# Altium PCB main.PcbDoc
Units mm, origin at the board's own origin, x right, y up, seen from the top; angles counter-clockwise.
Board outline 25 x 22.3 mm, 2 copper layers (Top Layer, Bottom Layer); 14 components, 16 nets, 52 pads, 18 vias.
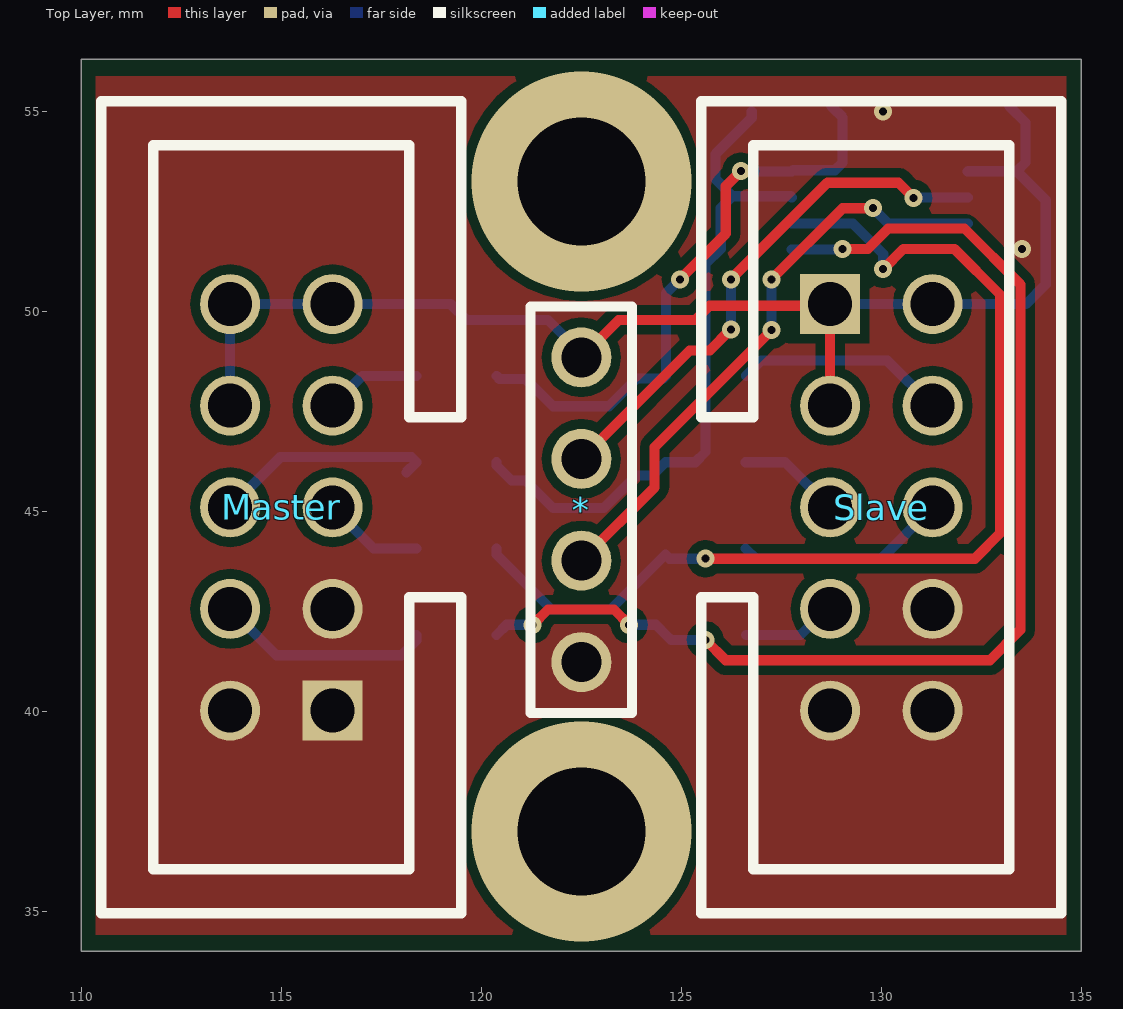
[diagram p0: Top Layer view]
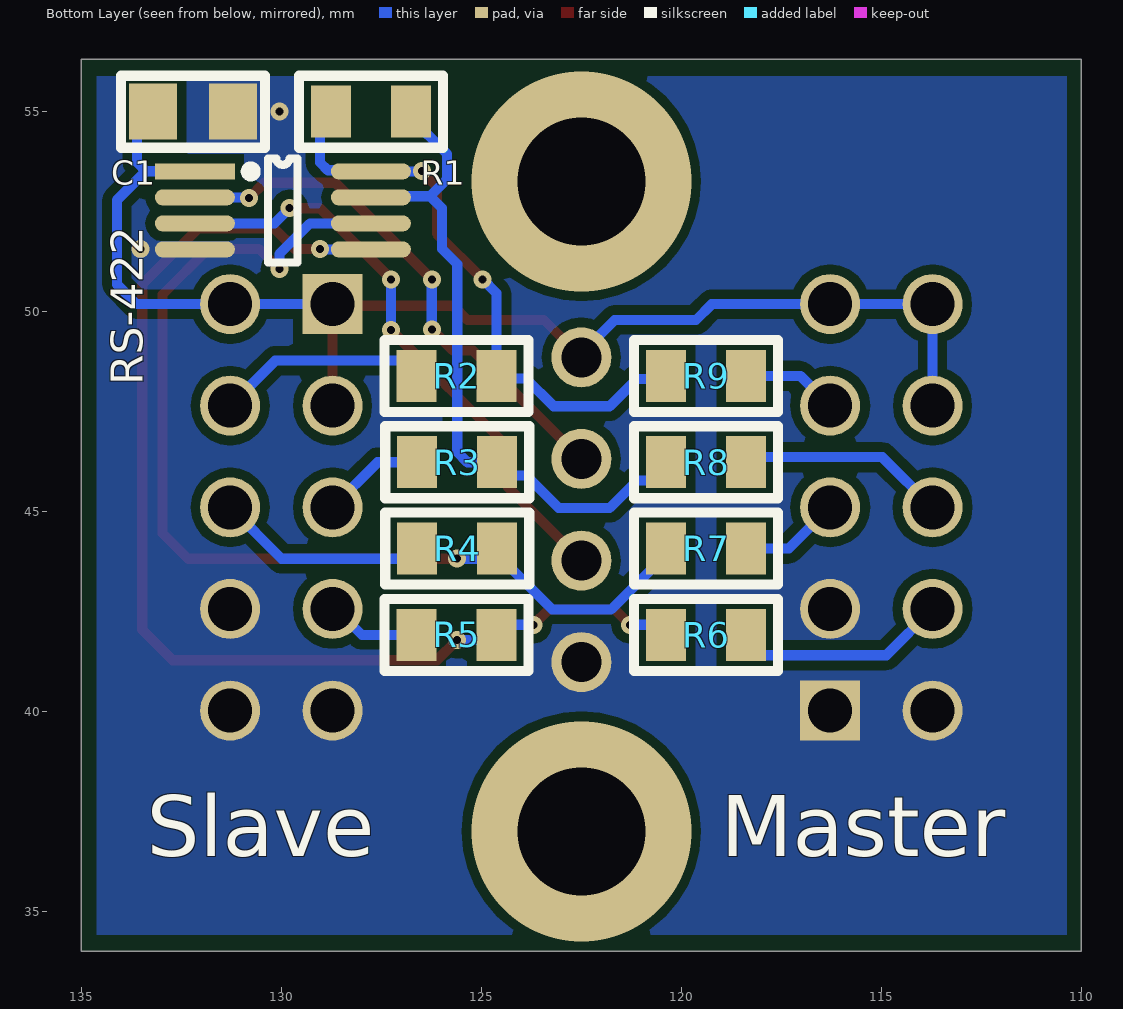
[diagram p1: Bottom Layer view, seen from below]
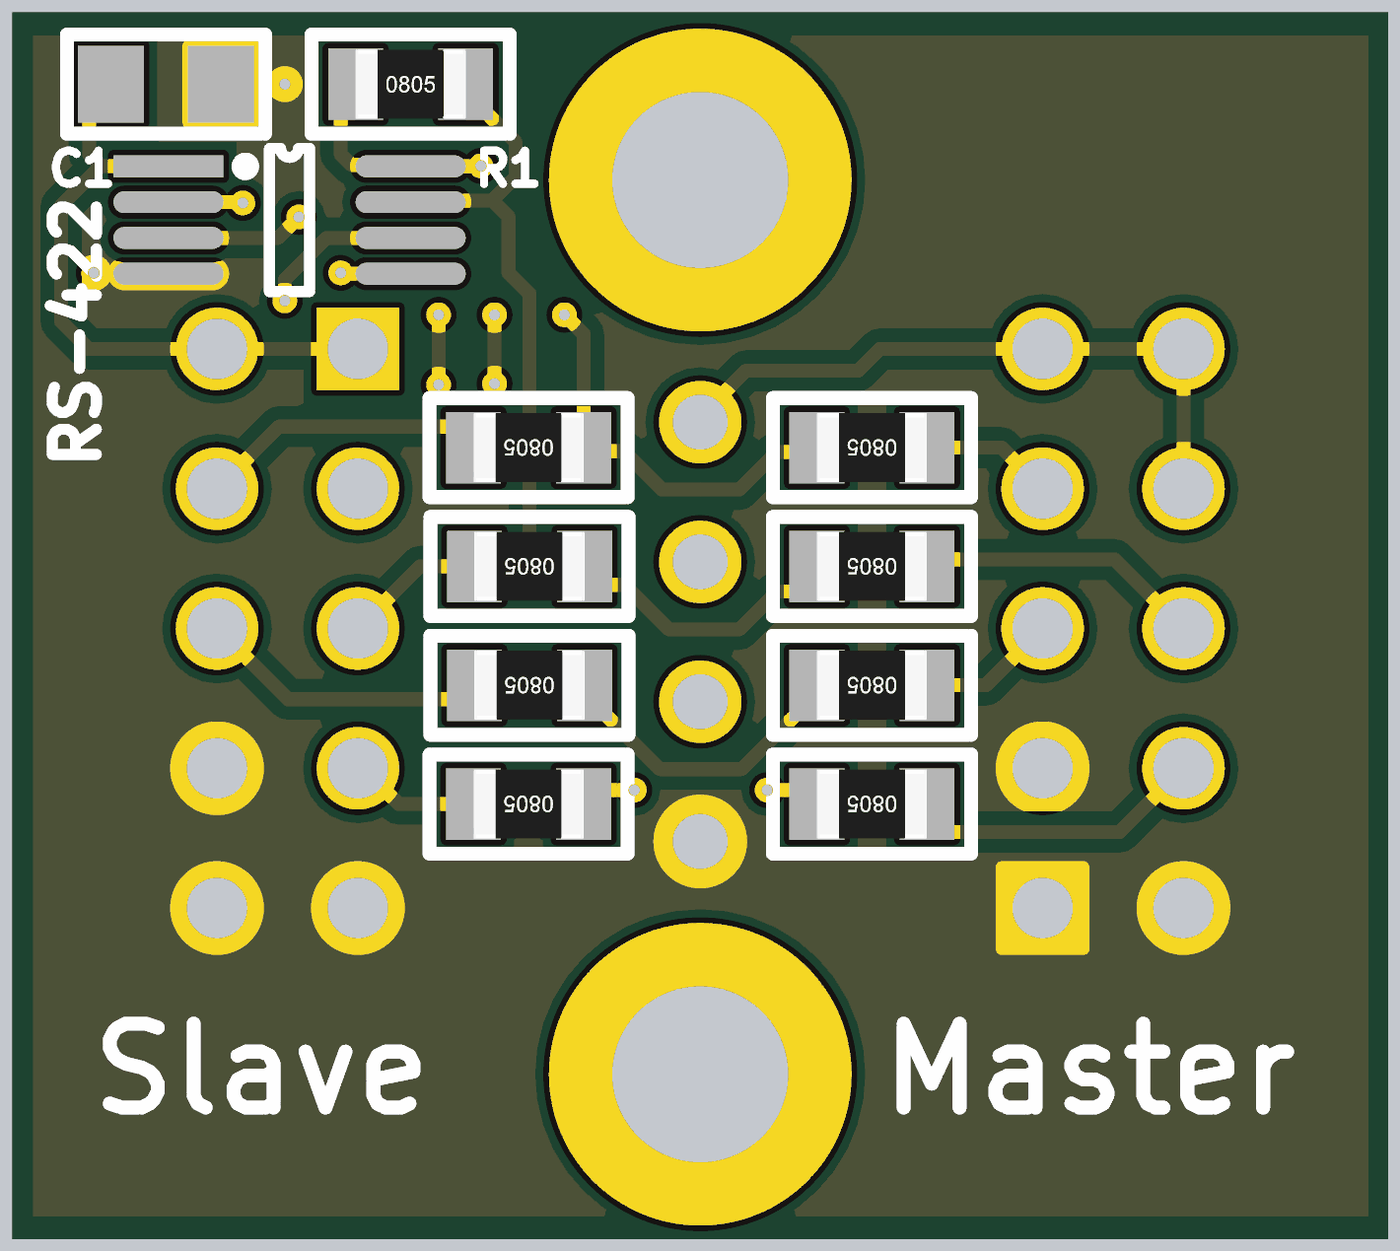
[diagram p2: 3D render of the assembled board from below, using the file's embedded part models]

## Layer stack, top to bottom
Top Solder: solder mask 0.0102, Solder Resist, Dk 3.5
Top Layer: signal copper 0.0356
Dielectric 1: dielectric 0.32, FR-4, Dk 4.8
Bottom Layer: signal copper 0.0356
Bottom Solder: solder mask 0.0102, Solder Resist, Dk 3.5

## Board outline
110,34 110,56.3 135,56.3 135,34

## Design rules (kind name [scope] priority, off if disabled: settings)
Clearance [All] p1: gap=0.24 ignorepadtopadclearanceinfootprint=FALSE
HoleSize [All] p1: absolutevalues=TRUE maxlimit=100 minlimit=0.025 maxpercent=80.000 minpercent=20.000
MinimumSolderMaskSliver [All] p1: minsoldermaskwidth=0
PolygonConnect [All] p1: connectstyle=Direct reliefconductorwidth=0.254 reliefentries=4 polygonreliefangle="90 Angle" airgapwidth=0.254
RoutingVias [All] p1: holewidth=0.2 width=0.45 viastyle="Through Hole" minholewidth=0.2 minwidth=0.45 maxholewidth=100 maxwidth=100
SilkToSilkClearance [All] p1: silktosilkclearance=0
SilkToSolderMaskClearance [IsPad] p1: minsilkscreentomaskgap=0 clearancetoexposedcopper=TRUE
SolderMaskExpansion [All] p1: expansion=0.102 istentingtop=FALSE
Width [All] p1: maxlimit=0.254 minlimit=0.254 preferedwidth=0.254
26 further rules are at their usual default settings.

## Components (designator, comment, footprint, x,y, rotation, side; value= is the part's Value field where it differs from the comment)
* "JUMPER_4" JUMPER_4 122.5,48.85 r270 top
C1 "100nF" FP_0805_CAP_085 132.207,54.991 r180 bottom
Master "Connector_10pin" FP_CONN10_SZK_ALLO 115,45.1 r90 top
R1 "120R" FP_0805_RES 127.762,54.991 r180 bottom
R2 "0R" FP_0805_RES 125.619,48.387 r0 bottom value=?
R3 "0R" FP_0805_RES 125.603,46.228 r0 bottom value=?
R4 "0R" FP_0805_RES 125.603,44.069 r0 bottom value=?
R5 "0R" FP_0805_RES 125.619,41.91 r0 bottom value=?
R6 "0R" FP_0805_RES 119.38,41.91 r0 bottom value=?
R7 "0R" FP_0805_RES 119.38,44.069 r0 bottom value=?
R8 "0R" FP_0805_RES 119.38,46.228 r0 bottom value=?
R9 "0R" FP_0805_RES 119.38,48.387 r0 bottom value=?
RS-422 "RS-422" NSOIC-8 132.162,53.497 r180 bottom
Slave "Connector_10pin" FP_CONN10_SZK_ALLO 130,45.1 r270 top

## Footprints (in the part's own frame and the unit in brackets; to place one, negate y for a bottom-side part, rotate by r counter-clockwise, add the part's x,y. Pads: shape width x height; smd on the part's side, far side on the other; paste and mask are expansions set on the pad)
FP_0805_CAP_085 [mm] "0805 kapacitás YAGEO 0.85mm magas"
  rect 1.2x1.4 smd: 1(-1,0) 2(1,0)
  silkscreen extent -1.8,-0.9 1.8,0.9, body extent -1,-0.64 1.03,0.64, height 0.85
FP_0805_RES [mm] "0805 ellenállás"
  rect 1x1.3 smd: 1(-1,0) 2(1,0)
  silkscreen extent -1.8,-0.9 1.8,0.9, body extent -1,-0.62 1,0.63, height 0.62
FP_CONN10_SZK_ALLO [mm]
  rect 1.5x1.5 hole 1.1: 1(-5.08,-1.28)
  round 1.5 hole 1.1: 2(-5.08,1.28) 3(-2.54,-1.28) 4(-2.54,1.28) 5(0,-1.28) 6(0,1.28) 7(2.54,-1.28) 8(2.54,1.28) 9(5.08,-1.28) 10(5.08,1.28)
  silkscreen extent -10.15,-4.5 10.15,4.5, body extent -5.33,-1.33 5.49,1.87, height 9
JUMPER_4 [mm]
  round 1.5 hole 1: 1(0,0) 2(2.54,0) 3(5.08,0) 4(7.62,0)
  silkscreen extent -1.27,-1.27 8.89,1.27
NSOIC-8 [mm]
  rect 2x0.4 smd: 1(0,0)
  oval 2x0.4 smd: 2(0,-0.65) 3(0,-1.3) 4(0,-1.95) 5(4.4,-1.95) 6(4.4,-1.3) 7(4.4,-0.65) 8(4.4,0)
  silkscreen extent 1.27,-2.28 2.56,0.33

## Part data
C1: library part "CAP 100nF", "Capacitor", Tolerance=+80%/-20%, Voltage=25V, Name="SMD Multilayer Ceramic Capacitor, 0805", Reference=1759167, Supplier=Farnell
R1: library part "RES 120R", "Resistor", Power=125mW, Tolerance=5%, Name="YAGEO (PHYCOMP)  RC0805JR-07120RL  SMD Chip Resistor, Thick Film, 120 ohm", Reference=9233890, Supplier=Farnell
R2 R3 R4 R5 R6 R7 R8 R9: library part RES, "Resistor"
RS-422: library part ISL83071, "RS-422 transceiver 3V3"

## Via types
v1: diameter 0.45, hole 0.2, Top Layer to Bottom Layer, 16 vias
v2: diameter 5.5, hole 3.2, Top Layer to Bottom Layer, 2 vias

## Nets (pads, with @x,y where several pads share a name; then routed paths per layer and width w, separated by ;. In a path a pad name is that pad's centre, name@x,y a point inside that pad or via, vN(x,y) a via of type N, cw(c..) or ccw(c..) an arc to the next point about the centre after c; other vN are vias at no path point)
3V3: *.1 C1.1 Master.8 Master.9 Master.10 RS-422.1 Slave.1 Slave.2 Slave.3 | length 33.1
  Top Layer w0.254: *.1 123.434,49.784 125.349,49.784 125.706,50.141 128.681,50.141 Slave.1 Slave.3
  Bottom Layer w0.254: Master.8 Master.10 Master.9 119.238,50.18 119.634,49.784 121.666,49.784 122.5,48.95 *.1 ; Slave.1 Slave.2 133.619,50.18 134.112,50.673 134.112,52.778 133.386,53.503 ; RS-422.1 132.168,53.503 133.386,53.503 ; C1.1@133.207,55.118 133.604,54.721 133.604,53.721 133.386,53.503
GND: *.4 C1.2 Master.1 Master.2 Master.3 RS-422.4 Slave.8 Slave.9 Slave.10
  other v1: 133.52,51.562 130.048,54.991
NetMaster_4: Master.4 R6.1 | length 5.4
  Bottom Layer w0.254: Master.4 114.878,41.402 118.007,41.402 118.38,41.775 R6.1
NetMaster_5: Master.5 R7.1 | length 2.5
  Bottom Layer w0.254: Master.5 117.311,44.069 R7.1
NetMaster_6: Master.6 R8.1 | length 5.6
  Bottom Layer w0.254: Master.6 114.975,46.355 118.253,46.355 R8.1 R8.1@118.126,45.974
NetMaster_7: Master.7 R9.1 | length 2.4
  Bottom Layer w0.254: Master.7 117.027,48.387 R9.1
NetR1_1: R1.1 R2.1 R9.2 RS-422.8 | length 14.9
  Top Layer w0.254: v1(124.968,50.8) 126.111,51.943 126.111,53.129 v1(126.488,53.506)
  Bottom Layer w0.254: R9.2 120.461,48.306 121.112,48.306 121.793,47.625 123.19,47.625 123.887,48.322 124.554,48.322 R2.1 124.619,50.451 v1(124.968,50.8) ; v1(126.488,53.506) 126.496,53.497 RS-422.8 127.79,53.525 128.836,53.525 129.032,53.721 129.032,54.848 R1.1@128.762,55.118
NetR1_2: R1.2 R3.1 R8.2 RS-422.7 | length 17.2
  Bottom Layer w0.254: R8.2 120.38,46.146 120.753,45.773 121.105,45.773 121.793,45.085 123.063,45.085 123.871,45.893 124.268,45.893 R3.1 125.349,46.228 125.603,46.482 125.603,51.181 125.984,51.562 125.984,52.578 126.281,52.875 ; R1.2 126.762,54.841 125.857,53.936 125.857,53.299 126.281,52.875 ; RS-422.7 127.734,52.875 126.281,52.875
NetR2_2: R2.2 Slave.4 | length 5.3
  Bottom Layer w0.254: R2.2 126.619,48.395 126.992,48.768 130.152,48.768 Slave.4
NetR3_2: R3.2 Slave.5 | length 2.6
  Bottom Layer w0.254: R3.2 127.592,46.228 Slave.5
NetR4_1: R4.1 R7.2 RS-422.6 | length 26.7
  Top Layer w0.254: v1(125.603,43.815) 132.334,43.815 132.969,44.45 132.969,50.419 131.826,51.562 130.556,51.562 v1(130.048,51.054)
  Bottom Layer w0.254: R7.2 120.38,43.919 120.753,43.546 121.754,42.545 123.229,42.545 124.23,43.546 124.603,43.919 124.707,43.815 v1(125.603,43.815) ; RS-422.6 129.286,52.197 130.048,51.435 v1(130.048,51.054)
NetR4_2: R4.2 Slave.6 | length 5.3
  Bottom Layer w0.254: R4.2 126.857,43.815 129.995,43.815 Slave.6
NetR5_1: R5.1 R6.2 RS-422.5 | length 29.3
  Top Layer w0.254: v1(121.285,42.164) 121.666,42.545 123.317,42.545 v1(123.698,42.164) ; v1(125.603,41.783) 126.111,41.275 132.715,41.275 133.477,42.037 133.477,50.673 132.08,52.07 130.175,52.07 129.667,51.562 v1(129.032,51.562)
  Bottom Layer w0.254: R6.2 120.634,42.164 v1(121.285,42.164) ; v1(123.698,42.164) 124.365,42.164 R5.1 124.746,41.783 v1(125.603,41.783) ; RS-422.5 129.017,51.547 v1(129.032,51.562)
NetR5_2: R5.2 Slave.7 | length 2.4
  Bottom Layer w0.254: R5.2 127.981,41.91 128.631,42.56 Slave.7
RX: *.2 RS-422.2 | length 13.4
  Top Layer w0.254: *.2 125.212,49.022 125.711,49.022 v1(126.238,49.549) ; v1(126.238,50.8) 128.651,53.213 130.429,53.213 v1(130.81,52.832)
  Bottom Layer w0.254: v1(126.238,49.549) v1(126.238,50.8) ; v1(130.81,52.832) 130.825,52.847 RS-422.2
TX: *.3 RS-422.3 | length 14.8
  Top Layer w0.254: *.3 124.333,45.603 124.333,46.609 v1(127.254,49.53) ; v1(127.254,50.8) 129.032,52.578 v1(129.794,52.578)
  Bottom Layer w0.254: v1(127.254,49.53) v1(127.254,50.8) ; v1(129.794,52.578) 130.175,52.197 RS-422.3
copper on no net:
  other v2: 122.5,37 122.5,53.25

## Polygon pours and split planes (outlines as drawn)
no net on Bottom Layer "NONET_L02_P003" (solid, pour order 3): 110.363,34.417
GND on Bottom Layer "GND_L02_P002" (solid, remove dead copper, pour order 2): 110.363,55.88 134.62,55.88 134.62,34.417 110.363,34.417
no net on Bottom Layer "NONET_L02_P001" (solid, pour order 1): 114.554,41.148
GND on Top Layer "GND_L01_P000" (solid, remove dead copper, pour order 0): 110.363,55.88 134.62,55.88 134.62,34.417 110.363,34.417

## Silkscreen, mask and mechanical layers (free items; w line width, h text height)
Mechanical 1:
  the board outline again, w0.254